# Altium PCB PCB - Solar.PcbDoc
Units mm, origin at the board's own origin, x right, y up, seen from the top; angles counter-clockwise.
Board outline 50.8 x 50.8 mm, 2 copper layers (Top Layer, Bottom Layer); 5 components, 4 nets, 17 pads, 0 vias.
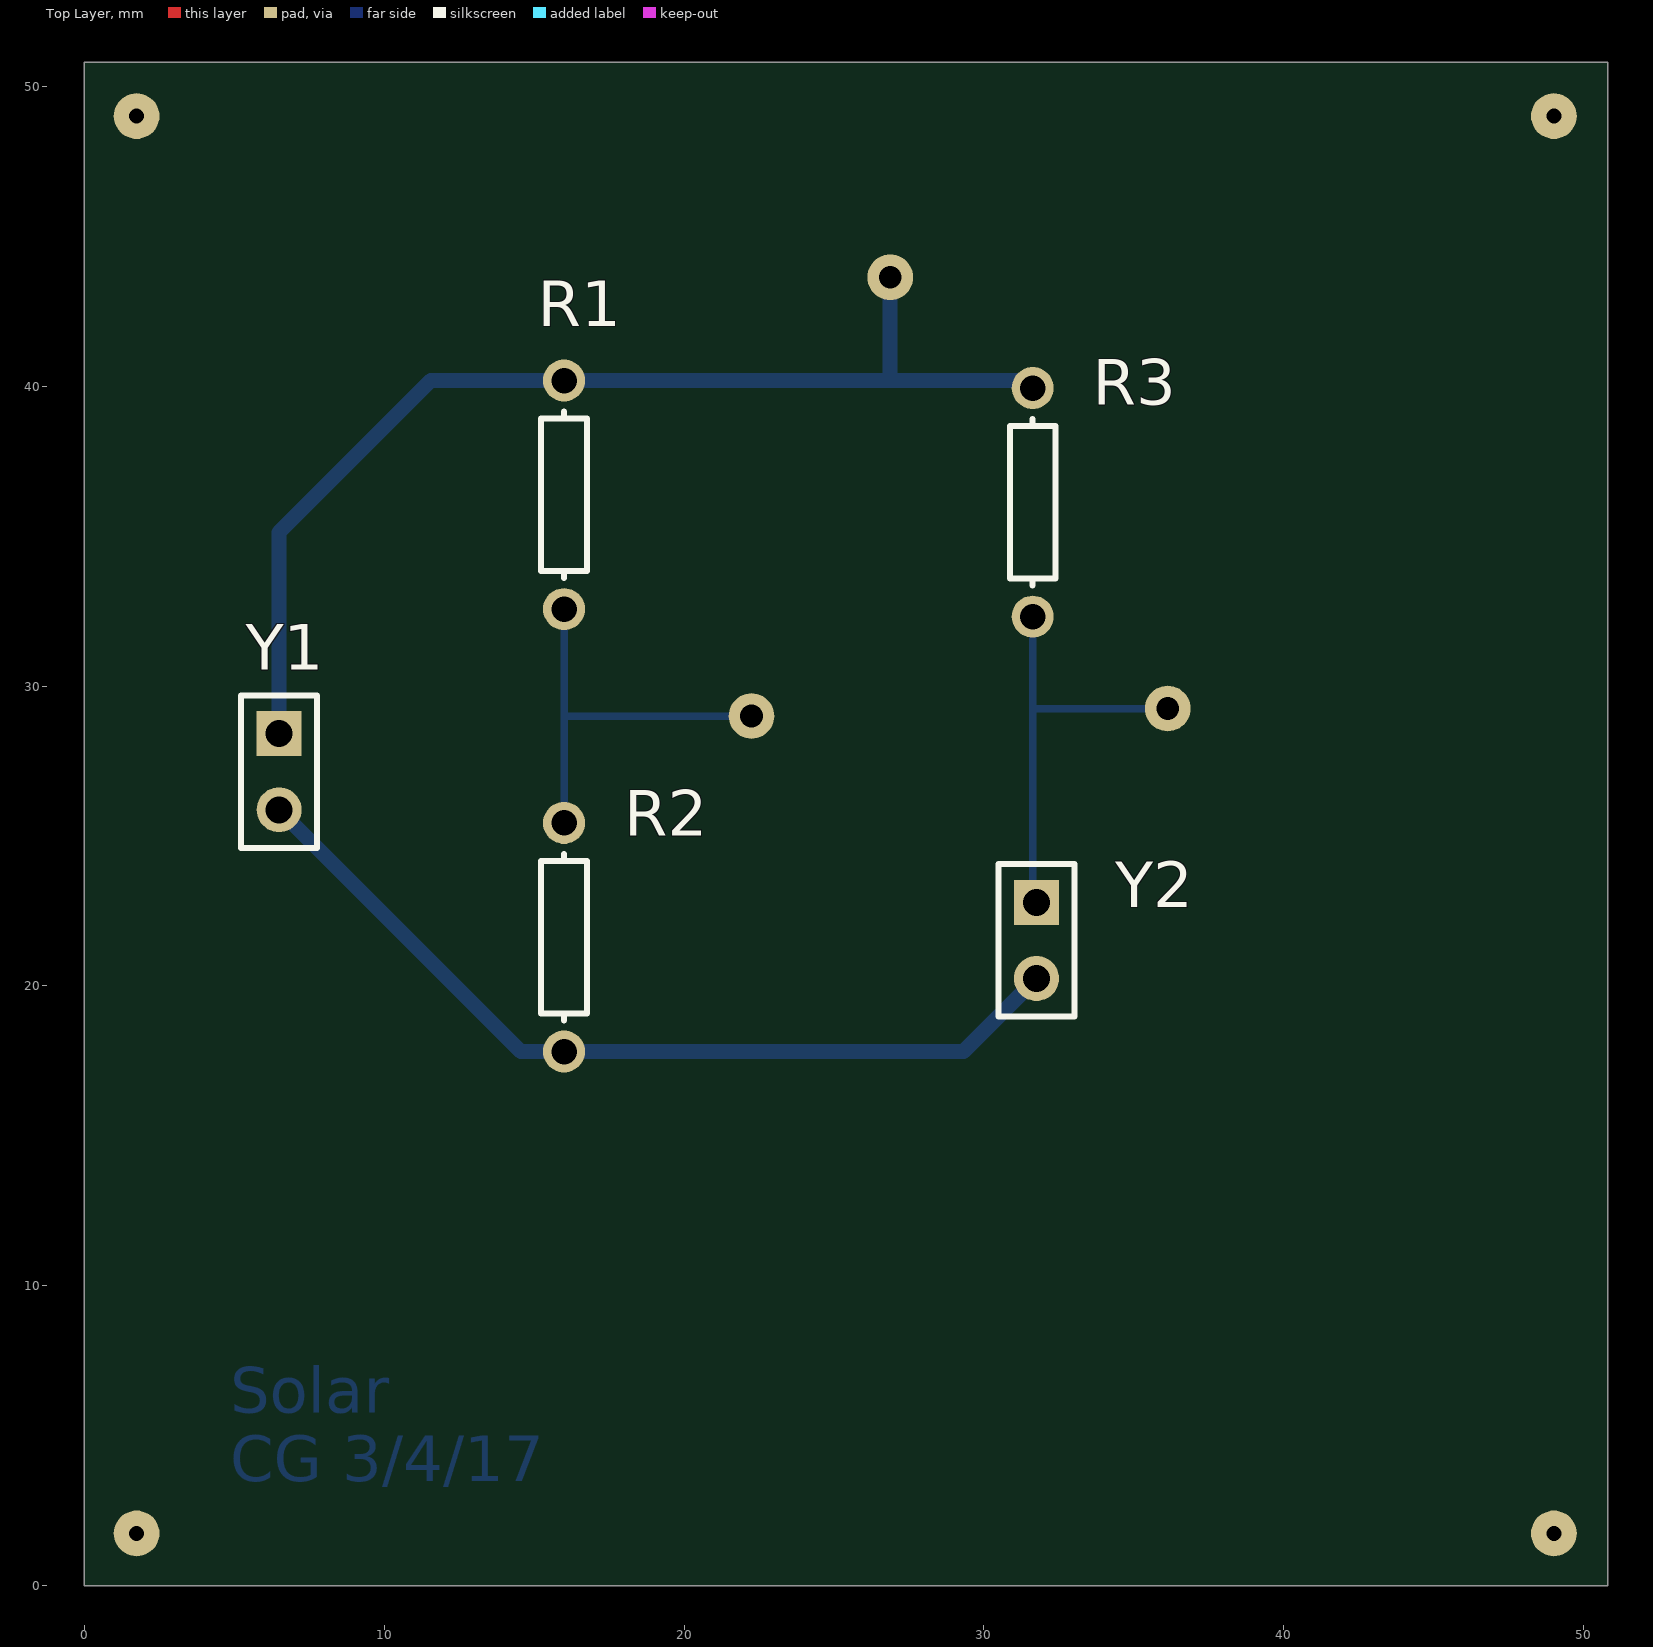
[diagram p0: Top Layer view]
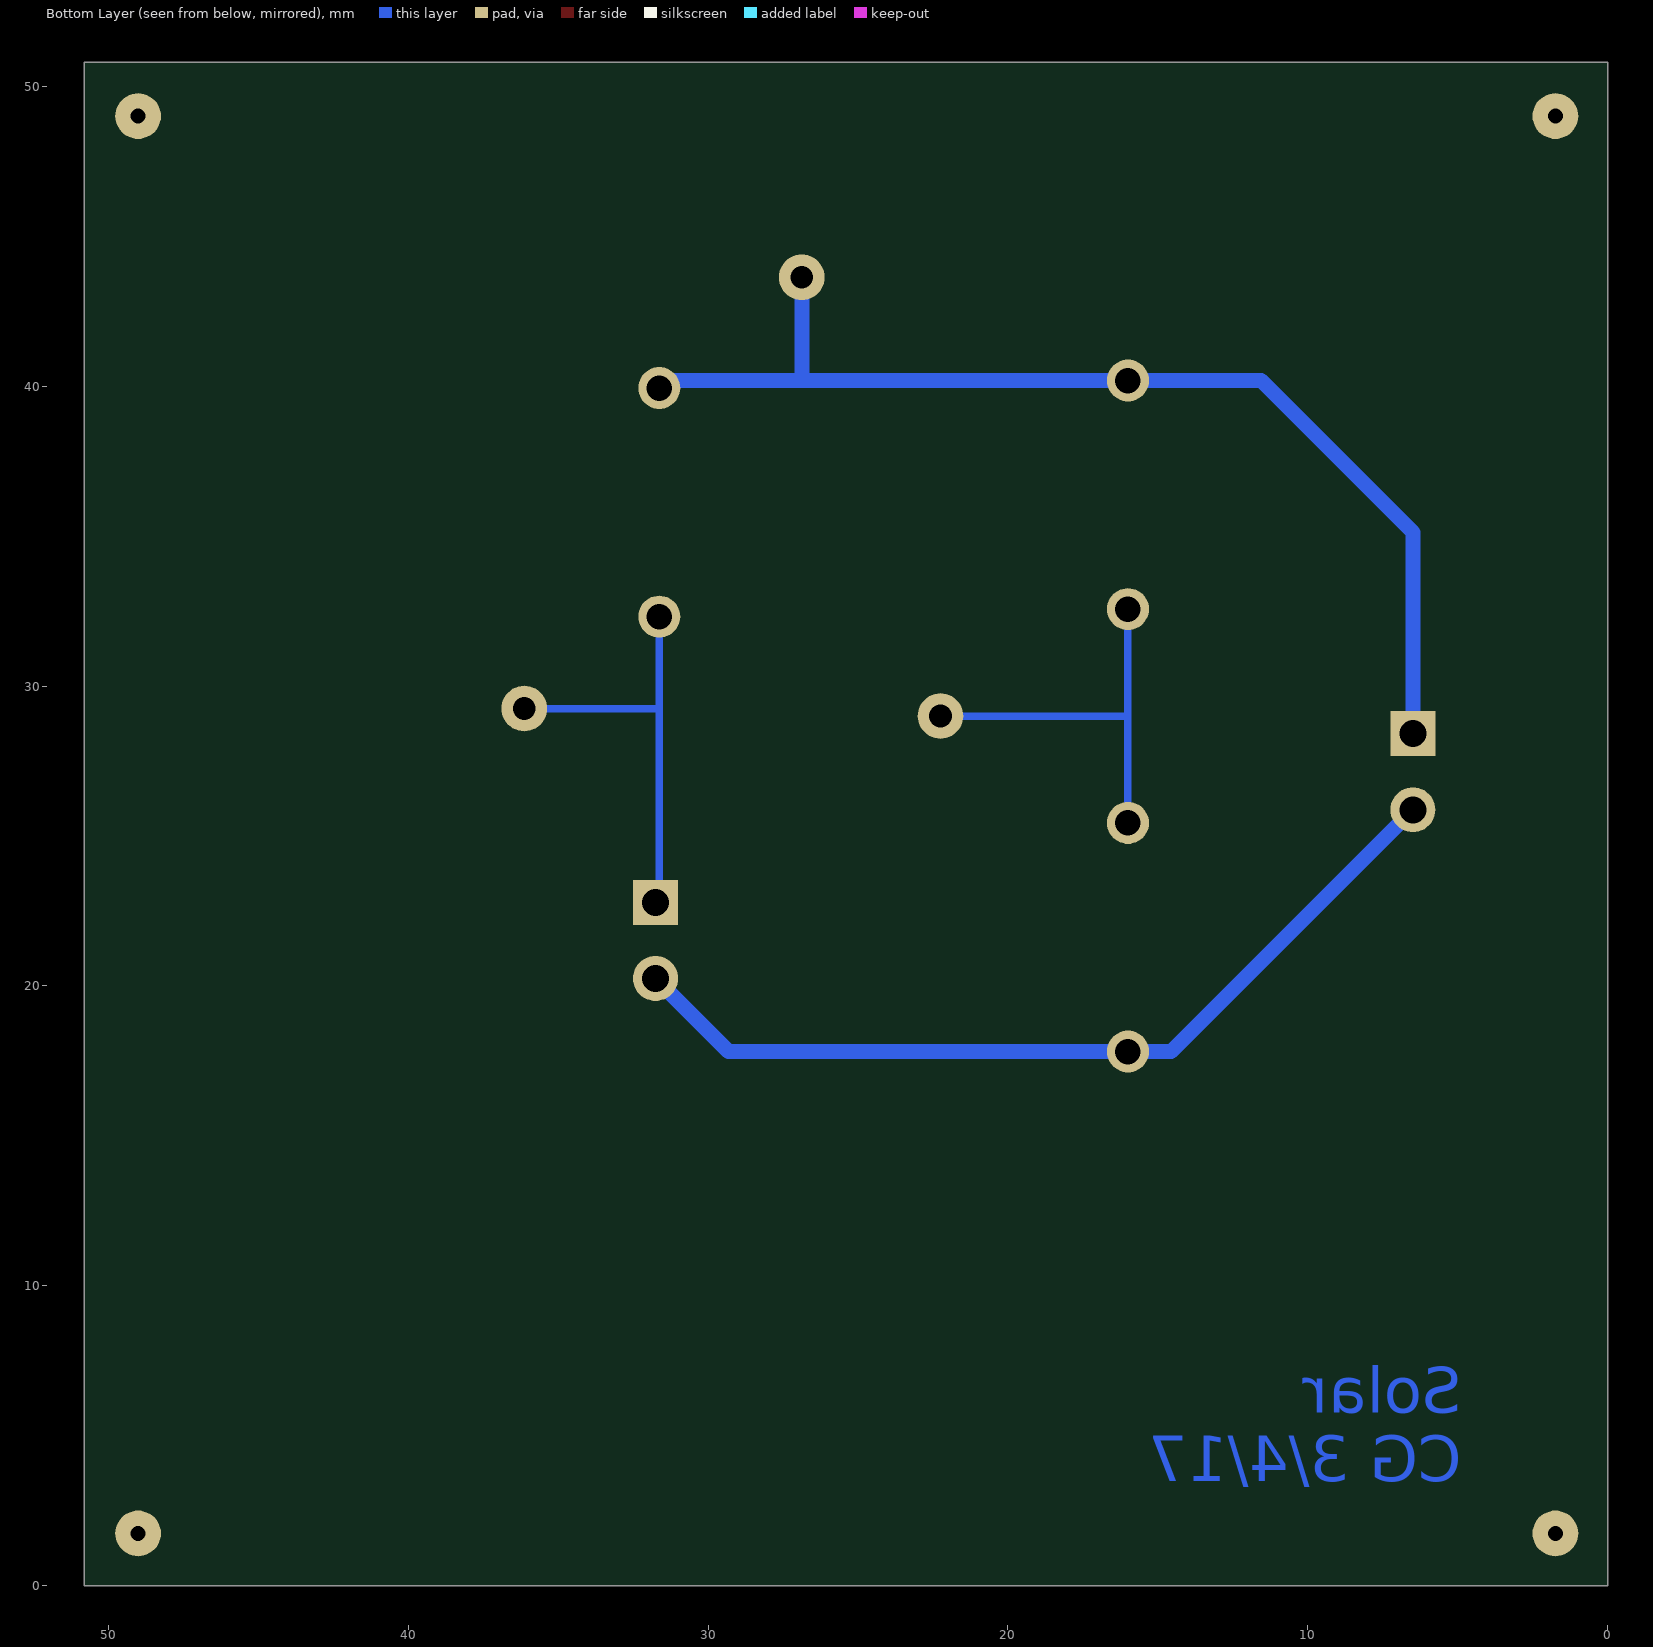
[diagram p1: Bottom Layer view, seen from below]

## Layer stack, top to bottom
Top Solder: solder mask 0.01, Solder Resist, Dk 3.5
Top Layer: signal copper 0.035
Dielectric1: dielectric 0.32, FR-4, Dk 4.8
Bottom Layer: signal copper 0.035
Bottom Solder: solder mask 0.01, Solder Resist, Dk 3.5

## Board outline
0,0 0,50.8 50.8,50.8 50.8,0

## Design rules (kind name [scope] priority, off if disabled: settings)
AssemblyTestPointUsage [All] p1 off:
AssemblyTestpoint [All] p1 off: testpointundercomponent=TRUE minsize=1.016 maxsize=2.54 preferedsize=1.524 minholesize=0 maxholesize=1.016 preferedholesize=0.813 testpointgrid=0.025 usegrid=TRUE gridtolerance=0 allowsidetop=TRUE allowsidebottom=TRUE
Clearance [All] p1: gap=0.25
FabricationTestPointUsage TestPointUsage [(InNet('GND') OR InNet('NetR3_1') OR InNet('V RASPI') OR InNet('VCC'))] p1 off: valid=0 allowmultiple=FALSE
FabricationTestpoint Testpoint [(IsPad And (OnTopLayer Or OnBottomLayer)) Or (IsVia) Or (IsPad And OnMultiLayer)] p1 off: side=2 testpointundercomponent=TRUE minsize=1.016 maxsize=2.54 preferedsize=1.524 minholesize=0 maxholesize=1.016 preferedholesize=0.813 testpointgrid=0.025 allowsidebottom=TRUE usegrid=TRUE gridtolerance=0
PolygonConnect [All] p1: connectstyle=Relief reliefconductorwidth=0.254 reliefentries=4 polygonreliefangle="90 Angle" airgapwidth=0.254
RoutingVias [All] p1: holewidth=0.6 width=1 viastyle="Through Hole" minholewidth=0.6 minwidth=1 maxholewidth=0.6 maxwidth=1
SilkToSolderMaskClearance SilkscreenOverComponentPads [IsPad] p1: minsilkscreentomaskgap=0.125 clearancetoexposedcopper=TRUE
SolderMaskExpansion [All] p1: expansion=0.102
Width Width_Power [(InNet('VCC') OR InNet('GND'))] p1: maxlimit=0.5 minlimit=0.25 preferedwidth=0.5 minimp=50.000000 maximp=50.000000 favimp=50.000000
Width [All] p2: maxlimit=0.25 minlimit=0.25 preferedwidth=0.25 minimp=50.000000 maximp=50.000000 favimp=50.000000
25 further rules are at their usual default settings.

## Components (designator, comment, footprint, x,y, rotation, side; value= is the part's Value field where it differs from the comment)
R1 "Res1" AXIAL-0.3 16,36.375 r90 top
R2 "Res1" AXIAL-0.3 16,21.625 r90 top
R3 "Res1" AXIAL-0.3 31.625,36.125 r90 top
Y1 "Header 2" HDR1X2 6.5,28.415 r270 top
Y2 "Header 2" HDR1X2 31.75,22.79 r270 top

## Footprints (in the part's own frame and the unit in brackets; to place one, negate y for a bottom-side part, rotate by r counter-clockwise, add the part's x,y. Pads: shape width x height; smd on the part's side, far side on the other; paste and mask are expansions set on the pad)
AXIAL-0.3 [mm] "Axial Device, Thru-Hole; 2 Leads; 0.3 in Pin Spacing"
  round 1.4 hole 0.85: 1(-3.81,0) 2(3.81,0)
  silkscreen extent -2.77,-0.76 2.77,0.76
HDR1X2 [mm] "Connector; Header; 2 Position"
  rect 1.5x1.5 hole 0.9: 1(0,0)
  round 1.5 hole 0.9: 2(2.54,0)
  silkscreen extent -1.27,-1.27 3.81,1.27

## Part data
R1 R2 R3: "Resistor"
Y1 Y2: "Header, 2-Pin"

## Free pads (board coordinates)
  round 1.524 hole 0.762: 4(22.25,29) 10(36.125,29.25) 11(26.875,43.625)
  round 1.524 hole 0.5 unplated: 5(1.75,49) 7(49,49) 8(1.75,1.75) 9(49,1.75)

## Nets (pads, with @x,y where several pads share a name; then routed paths per layer and width w, separated by ;. In a path a pad name is that pad's centre, name@x,y a point inside that pad or via, vN(x,y) a via of type N, cw(c..) or ccw(c..) an arc to the next point about the centre after c; other vN are vias at no path point)
GND: R2.1 Y1.2 Y2.2 | length 29.6
  Bottom Layer w0.5: Y1.2 14.56,17.815 R2.1 26.5,17.815 29.315,17.815 Y2.2
NetR3_1: pad.10 R3.1 Y2.1 | length 14.1
  Bottom Layer w0.25: R3.1 31.625,29.25 ; Y2.1 31.625,22.915 31.625,29.25 ; pad.10 31.625,29.25
"V RASPI": pad.4 R1.1 R2.2 | length 13.9
  Bottom Layer w0.25: R2.2 16,29 ; R1.1@16.375,32.19 R1.1 16,29 ; pad.4 16,29
VCC: pad.11 R1.2 R3.2 Y1.1 | length 37.5
  Bottom Layer w0.5: Y1.1 6.5,35.125 11.56,40.185 R1.2 26.875,40.185 ; pad.11 26.875,40.185 ; R3.2 31.375,40.185 26.875,40.185

## Other copper
Bottom Layer:
  text "Solar / CG 3/4/17" at 4.871,3.488 h1.52

## Silkscreen, mask and mechanical layers (free items; w line width, h text height)
Mechanical 16:
  drawing of 1874 lines, arcs and shapes, not listed
  text "1" at -84.286,110.509 h1.78
  text "2" at -11.642,110.509 h1.78
  text "3" at 61.51,110.509 h1.78
  text "4" at 134.408,110.509 h1.78
  text "A" at -118.627,87.497 h1.78
  text "A" at 168.393,87.497 h1.78
  text "B" at -118.627,39.44 h1.78
  text "B" at 168.393,39.44 h1.78
  text "C" at -118.627,-9.074 h1.78
  text "C" at 168.393,-9.074 h1.78
  text "ENGINEER:" at 53.458,-46.082 h1.14
  text "TITLE:" at 91.558,-46.082 h1.14
  text "PCB DESIGNER:" at 53.458,-53.575 h1.14
  text "D" at -118.627,-57.08 h1.78
  text "D" at 168.393,-57.08 h1.78
  text "DATE:" at 53.458,-61.322 h1.14
  text "PART NO.:" at 91.558,-61.322 h1.14
  text "REV:" at 144.898,-61.322 h1.14
  text "Altium Limited" at 20.438,-63.862 h1.78
  text ".PRINT_DATE" at 54.728,-64.37 h1.78
  text "12a Rodborough Rd" at 20.438,-66.402 h1.78
  text "Frenchs Forest" at 20.438,-68.942 h1.78
  text "FILE NAME:" at 53.458,-68.942 h1.14
  text "DWG NO:" at 91.558,-68.942 h1.14
  text "SCALE:" at 144.898,-68.942 h1.14
  text "NSW 2086" at 20.438,-71.482 h1.78
  text ".PCB_FILE_NAME_NO_PATH" at 54.728,-71.99 h1.78
  text "1" at -84.286,-77.451 h1.78
  text "2" at -11.642,-77.451 h1.78
  text "3" at 61.51,-77.451 h1.78
  text "4" at 134.408,-77.451 h1.78